# EAGLE board Smart_Wiper (EAGLE 8.4.1)
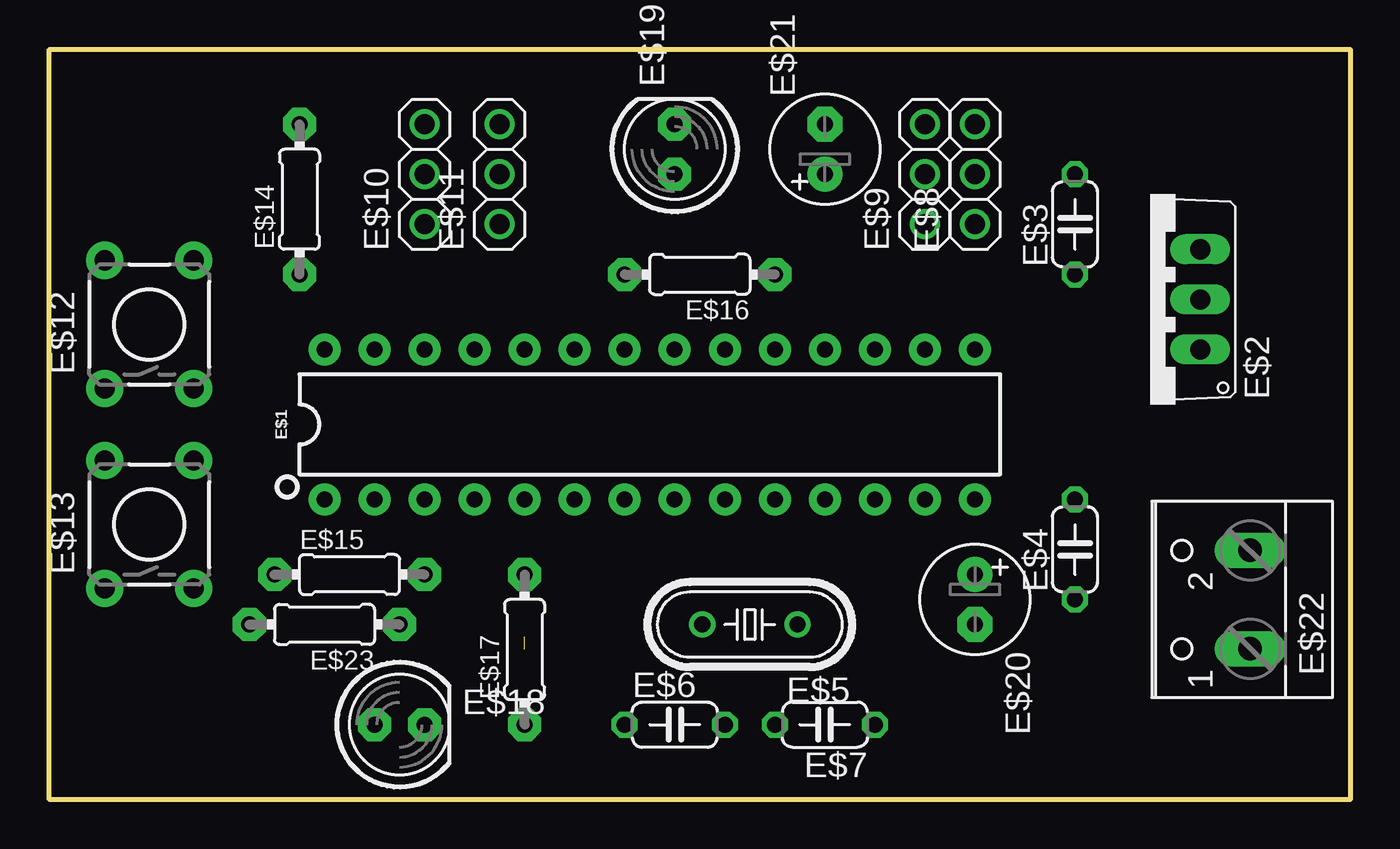
[diagram p0: board, top side]
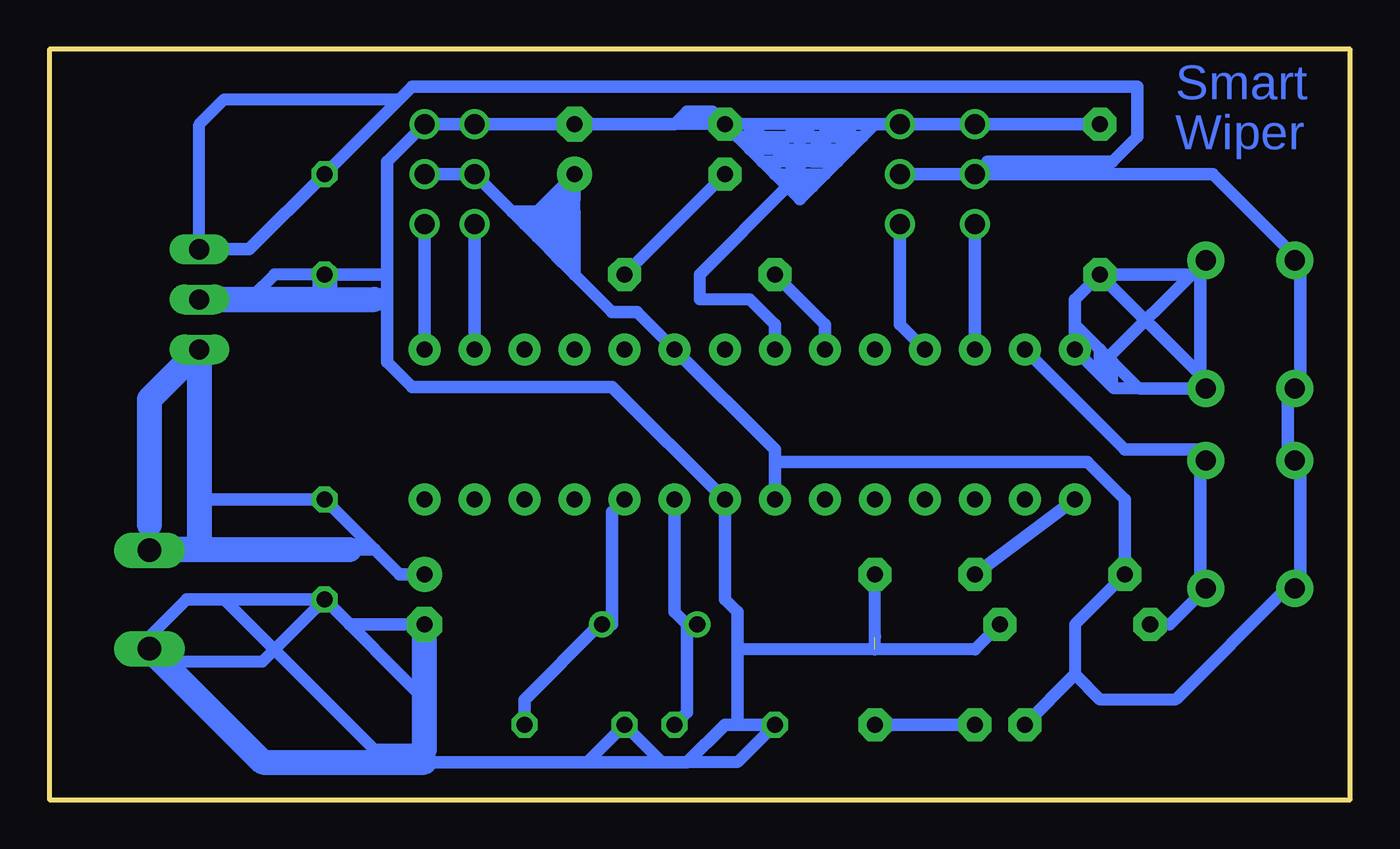
[diagram p1: board, bottom side, seen from below]

Size 66.04 x 38.1 mm. Coordinates in mm from the lower left corner, seen from the top.
Outline: 0,0 0,38.1 66.04,38.1 66.04,0 0,0
Copper layers (1*16): Top 0.035mm / dielectric 1.5mm / Bottom 0.035mm
Design rules "default *": minimum track width 25mil, minimum drill 0.35mm, track to track 25mil, track to pad 25mil, pad to pad 6mil, via to via 6mil, smd to smd 6mil, copper to edge 40mil, drill to drill 6mil, minimum pad ring 10mil, minimum via ring 8mil, stop-mask expansion 4mil, vias tented up to drill 0mil, thermal gap 10mil

## Footprints (pad centres in the part's own frame; a part is rotated, then mirrored left to right if it is on the bottom)
DIP28 = drill 0.813 pad 1.626: 1 -16.51,-3.81; 2 -13.97,-3.81; 3 -11.43,-3.81; 4 -8.89,-3.81; 5 -6.35,-3.81; 6 -3.81,-3.81; 7 -1.27,-3.81; 8 1.27,-3.81; 9 3.81,-3.81; 10 6.35,-3.81; 11 8.89,-3.81; 12 11.43,-3.81; 13 13.97,-3.81; 14 16.51,-3.81; 15 16.51,3.81; 16 13.97,3.81; 17 11.43,3.81; 18 8.89,3.81; 19 6.35,3.81; 20 3.81,3.81; 21 1.27,3.81; 22 -1.27,3.81; 23 -3.81,3.81; 24 -6.35,3.81; 25 -8.89,3.81; 26 -11.43,3.81; 27 -13.97,3.81; 28 -16.51,3.81
TO220V = drill 1.016 long: 1 -2.54,-2.54; 2 0,-2.54; 3 2.54,-2.54
C050-024X044 = drill 0.813 octagon: 1 -2.54,0; 2 2.54,0
HC49/S = drill 0.813: 1 -2.413,0; 2 2.413,0
1X03 = drill 1.016: 1 -2.54,0; 2 0,0; 3 2.54,0
TACTILE-PTH = drill 1.016 pad 1.88: 1 -3.251,2.261; 2 3.251,2.261; 3 -3.251,-2.261; 4 3.251,-2.261
0204/7 = drill 0.813 pad 1.676 octagon: 1 -3.81,0; 2 3.81,0
LED5MM = drill 0.813 pad 1.676 octagon: A -1.27,0; K 1.27,0
E2,5-6 = drill 0.813 pad 1.778: + -1.27,0 | drill 0.813 pad 1.778 octagon: - 1.27,0
W237-102 = drill 1.194 long: 1 -2.5,-1.27; 2 2.5,-1.27

## Placement (x,y rotation side)
E$1  [DIP28]  30.48,19.05 0 top
E$2  [TO220V]  55.88,25.4 90 top
E$3  [C050-024X044]  52.07,29.21 90 top
E$4  [C050-024X044]  52.07,12.7 90 top
E$5  [HC49/S]  35.56,8.89 180 top
E$6  [C050-024X044]  31.75,3.81 0 top
E$7  [C050-024X044]  39.37,3.81 180 top
E$8  [1X03]  46.99,31.75 90 top
E$9  [1X03]  44.45,31.75 90 top
E$10  [1X03]  19.05,31.75 90 top
E$11  [1X03]  22.86,31.75 90 top
E$12  [TACTILE-PTH]  5.08,24.13 90 top
E$13  [TACTILE-PTH]  5.08,13.97 90 top
E$14  [0204/7]  12.7,30.48 90 top
E$15  [0204/7]  15.24,11.43 0 top
E$16  [0204/7]  33.02,26.67 180 top
E$17  [0204/7]  24.13,7.62 90 top
E$18  [LED5MM]  17.78,3.81 0 top
E$19  [LED5MM]  31.75,33.02 90 top
E$20  [E2,5-6]  46.99,10.16 270 top
E$21  [E2,5-6]  39.37,33.02 90 top
E$22  [W237-102]  59.69,10.16 90 top
E$23  [0204/7]  13.97,8.89 180 top

## Library data of the parts
E$1 = SparkFun-IC-Microcontroller
E$2-E$11 E$14-E$21 E$23 = adafruit
E$12 E$13 = SparkFun-Retired
E$22 = con-wago-500

## Nets
S$1: E$1.27 E$13.3 E$13.4 E$23.2
S$2: E$17.1 E$18.K
S$3: E$1.9 E$5.2 E$6.2
S$4: E$1.10 E$5.1 E$7.1
S$5: E$1.28 E$12.3 E$12.4 E$14.1
S$6: E$1.7 E$1.20 E$2.3 E$3.2 E$8.2 E$9.2 E$10.2 E$11.2 E$12.1 E$12.2 E$13.1 E$13.2 E$15.1 E$18.A E$21.+
S$7: E$1.1 E$15.2
S$8: E$1.23 E$16.2
S$9: E$16.1 E$19.A
S$10: E$1.26 E$10.1
S$11: E$1.25 E$11.1
S$12: E$1.15 E$8.1
S$13: E$1.16 E$9.1
S$14: E$2.1 E$4.2 E$20.+ E$22.2
S$15: E$1.8 E$1.22 E$2.2 E$3.1 E$4.1 E$6.1 E$7.2 E$8.3 E$9.3 E$10.3 E$11.3 E$14.2 E$17.2 E$19.K E$20.- E$22.1 E$23.1

## Tracks (layer width: path | path; a pad name or v marks a point on that pad's centre or on a via)
S$1
  Bottom 0.61: E$13.3 9.17,8.89 E$23.2
  Bottom 0.635: 7.62,10.16 E$13.3 7.62,10.79 7.62,17.15 E$13.4 7.62,17.78 11.43,17.78 E$1.27
S$2
  Bottom 0.635: E$17.1 E$18.K
S$3
  Bottom 0.635: 33.66,8.89 33.66,4.45 E$6.2 | E$1.9 34.29,9.53 33.66,8.89 | 33.66,8.89 E$5.2
S$4
  Bottom 0.635: E$1.10 37.47,14.6 37.47,8.89 E$5.1 38.1,8.89 41.91,5.08 E$7.1
S$5
  Bottom 0.61: 12.7,21.59 12.06,20.95 | 12.06,20.95 11.99,20.88 E$12.3 10.72,20.88 12.06,22.23 | E$12.4 12.7,22.02 | 12.7,22.02 12.7,21.59 | E$14.1 7.62,21.59 | 12.7,22.86 12.06,22.23 | 12.7,22.86 13.97,24.13 | 12.06,20.95 12.06,22.23 | 12.7,22.02 12.7,22.86 | E$1.28 12.7,21.59
  Bottom 0.635: E$1.28 13.97,24.13 13.97,25.4 E$14.1 7.62,26.67 | 7.62,26.67 7.62,27.3 E$12.4 7.62,26.67 | 7.62,26.67 7.62,21.59 7.62,20.95 E$12.3
S$6
  Bottom 0.61: E$13.1 3.25,10.72 8.89,5.08 12.7,5.08 13.97,6.35 13.97,8.89 E$15.1 | 40.64,30.48 41.28,29.84 | 40.64,30.48 40.01,31.12 | 40.01,31.12 E$21.+ | E$21.+ 39.37,30.48 | 39.37,29.21 39.37,27.94 | 39.37,27.94 39.37,26.67 | 40.01,30.48 40.01,29.84 | 40.01,30.48 40.01,31.12 | 40.01,29.84 39.37,29.21 | 40.01,29.84 40.64,30.48 | 41.28,29.84 40.64,29.21 | 41.28,28.57 40.64,29.21 | 40.64,29.21 40.01,29.84 | 40.64,29.84 40.01,30.48 | 40.64,29.84 41.28,29.84 | 41.28,29.84 42.55,29.84 | 41.28,28.57 40.01,28.57 | 41.28,28.57 41.28,29.84 | 41.28,29.84 41.91,29.21 40.64,27.94 | 40.64,27.94 39.37,27.94 | 40.01,28.57 39.37,27.94 | 39.37,27.94 40.01,27.3 | 40.64,29.21 40.64,29.84 | 40.64,29.21 40.64,27.94 | 39.37,29.21 40.64,29.21 | 40.64,29.21 40.01,28.57 | 40.64,27.94 39.37,29.21 | 39.37,29.84 39.37,30.48 | 39.37,30.48 40.01,30.48 | 40.01,30.48 39.37,29.84 | 39.37,29.84 39.37,29.21 | E$21.+ 39.37,31.12 40.01,30.48 | E$2.3 58.42,34.29 57.15,35.56 48.26,35.56 47.62,36.2
  Bottom 0.635: E$8.2 E$9.2 42.55,29.84 41.91,29.21 41.28,28.57 40.64,27.94 40.01,27.3 39.37,26.67 37.47,24.77 36.2,24.77 E$1.20 29.21,17.78 29.21,17.15 | 29.21,17.15 E$1.7 | E$11.2 E$10.2 | E$10.2 6.99,31.75 3.17,27.94 E$12.2 2.54,27.3 2.54,20.95 E$12.1 3.17,20.32 3.17,17.78 E$13.2 2.54,17.15 2.54,10.79 E$13.1 | 29.21,17.15 13.33,17.15 11.43,15.24 E$15.1 | 13.97,6.35 E$18.A | E$2.3 55.88,27.94 E$3.2 47.62,36.2 10.79,36.2 10.79,33.66 12.06,32.38 18.41,32.38 E$10.2
S$7
  Bottom 0.635: E$15.2 E$1.1
S$8
  Bottom 0.635: E$1.23 26.67,24.13 E$16.2
S$9
  Bottom 0.635: E$19.A E$16.1
S$10
  Bottom 0.635: E$1.26 E$10.1
S$11
  Bottom 0.635: E$11.1 22.86,24.13 E$1.25
S$12
  Bottom 0.635: E$1.15 E$8.1
S$13
  Bottom 0.635: E$1.16 E$9.1
S$14
  Bottom 0.61: 60.96,13.97 E$22.2 60.92,12.7 58.42,12.7 50.8,12.7 49.53,12.7
  Bottom 0.635: E$20.+ 48.26,11.43 49.53,12.7 E$4.2 58.42,15.24 | 58.42,15.24 58.42,12.7 | 58.42,15.24 E$2.1 | 60.92,12.7 60.96,12.7 E$22.2
  Bottom 1.27: 60.96,13.97 60.96,20.32 E$2.1 58.42,12.7 60.92,12.7 | E$22.2 60.92,12.7 | 60.92,12.7 50.8,12.7
S$15  (1 unrouted)
  Bottom 0.61: 29.21,24.13 30.48,25.4 33.02,25.4 33.02,26.67 28.57,31.12 27.94,31.75 | 34.29,34.29 E$19.K 30.48,34.29 | E$11.3 25.4,34.29 | 25.4,34.29 26.67,34.29 | 26.67,34.29 27.94,34.29 | 27.94,34.29 30.48,34.29 | 27.3,32.38 26.04,32.38 26.67,33.02 | 27.94,32.38 29.21,32.38 | 29.21,32.38 29.85,32.38 | 27.94,30.48 27.94,31.75 | 27.94,31.75 27.94,32.38 | 27.94,32.38 27.94,34.29 | 27.94,34.29 29.21,33.02 | 29.21,33.02 30.48,33.02 | 27.94,34.29 26.67,33.02 | 25.4,34.29 25.4,33.02 | 26.04,33.66 26.67,34.29 | 26.67,34.29 26.67,33.02 | 26.67,33.02 27.3,32.38 | 27.3,32.38 27.94,32.38 | 29.21,32.38 29.21,31.75 27.94,31.75 | 27.94,31.75 26.67,31.75 | 27.3,31.12 27.94,31.75 | 29.21,33.02 27.94,31.75 | 30.48,34.29 30.48,33.02 | 30.48,33.02 29.85,33.66 | 29.85,33.66 31.11,33.66 | 30.48,34.29 29.85,33.66 | 29.85,33.66 29.21,33.02 | 29.21,33.02 25.4,33.02 | 25.4,33.02 26.04,33.66 | 29.85,33.66 26.04,33.66 | 25.4,34.29 26.04,33.66 | 26.04,33.66 24.76,33.66 | E$23.1 19.05,7.62 24.13,7.62 | 24.13,7.62 31.11,7.62 | 24.13,7.62 E$17.2 | E$7.2 38.73,1.91 39.37,1.91 | E$6.1 31.11,1.91 33.66,1.91 | 60.3,7.01 E$22.1 | 60.3,7.01 55.21,1.91 46.99,1.91 | 60.3,7.01 55.23,7.01 E$4.1 46.99,5.08 46.99,2.54 49.53,2.54 57.15,10.16 | E$3.1 54.61,26.67 55.25,26.03 | 55.25,26.03 55.88,25.4 | 55.88,25.4 E$2.2 55.88,25.4 | 55.88,25.4 55.25,26.03
  Bottom 0.635: 31.11,3.81 31.75,3.81 33.66,1.91 34.93,1.91 | 31.11,3.81 E$6.1 | 34.93,1.91 E$7.2 | 31.11,3.81 31.11,7.62 31.11,9.53 31.75,10.16 E$1.8 37.47,20.95 47.62,20.95 48.9,22.23 48.9,25.4 | E$1.22 29.21,24.13 | E$14.2 E$10.3 E$11.3 24.13,34.29 24.76,33.66 25.4,33.02 26.04,32.38 26.67,31.75 27.3,31.12 27.94,30.48 28.57,31.12 29.21,31.75 29.85,32.38 30.48,33.02 31.11,33.66 E$19.K 32.39,34.92 33.66,34.92 34.29,34.29 E$9.3 E$8.3 48.9,32.38 48.9,26.67 | 48.9,26.67 48.9,25.4 | E$20.- 50.8,8.89 E$4.1 57.15,10.16 59.05,10.16 60.96,8.26 E$22.1 | 48.9,26.67 E$3.1 | 48.9,25.4 49.53,25.4 52.07,25.4 55.88,25.4 | 24.13,8.26 24.13,8.29 | 46.99,2.54 46.99,1.91 39.37,1.91 34.93,1.91
  Bottom 1.27: E$3.1 52.07,25.4 E$2.2 49.53,25.4 | E$22.1 55.21,1.91 46.99,1.91 | 46.99,2.54 E$20.-

## Text on the board
Bottom: Smart | Wiper